# EAGLE board pcan-001 (EAGLE 9.6.2)
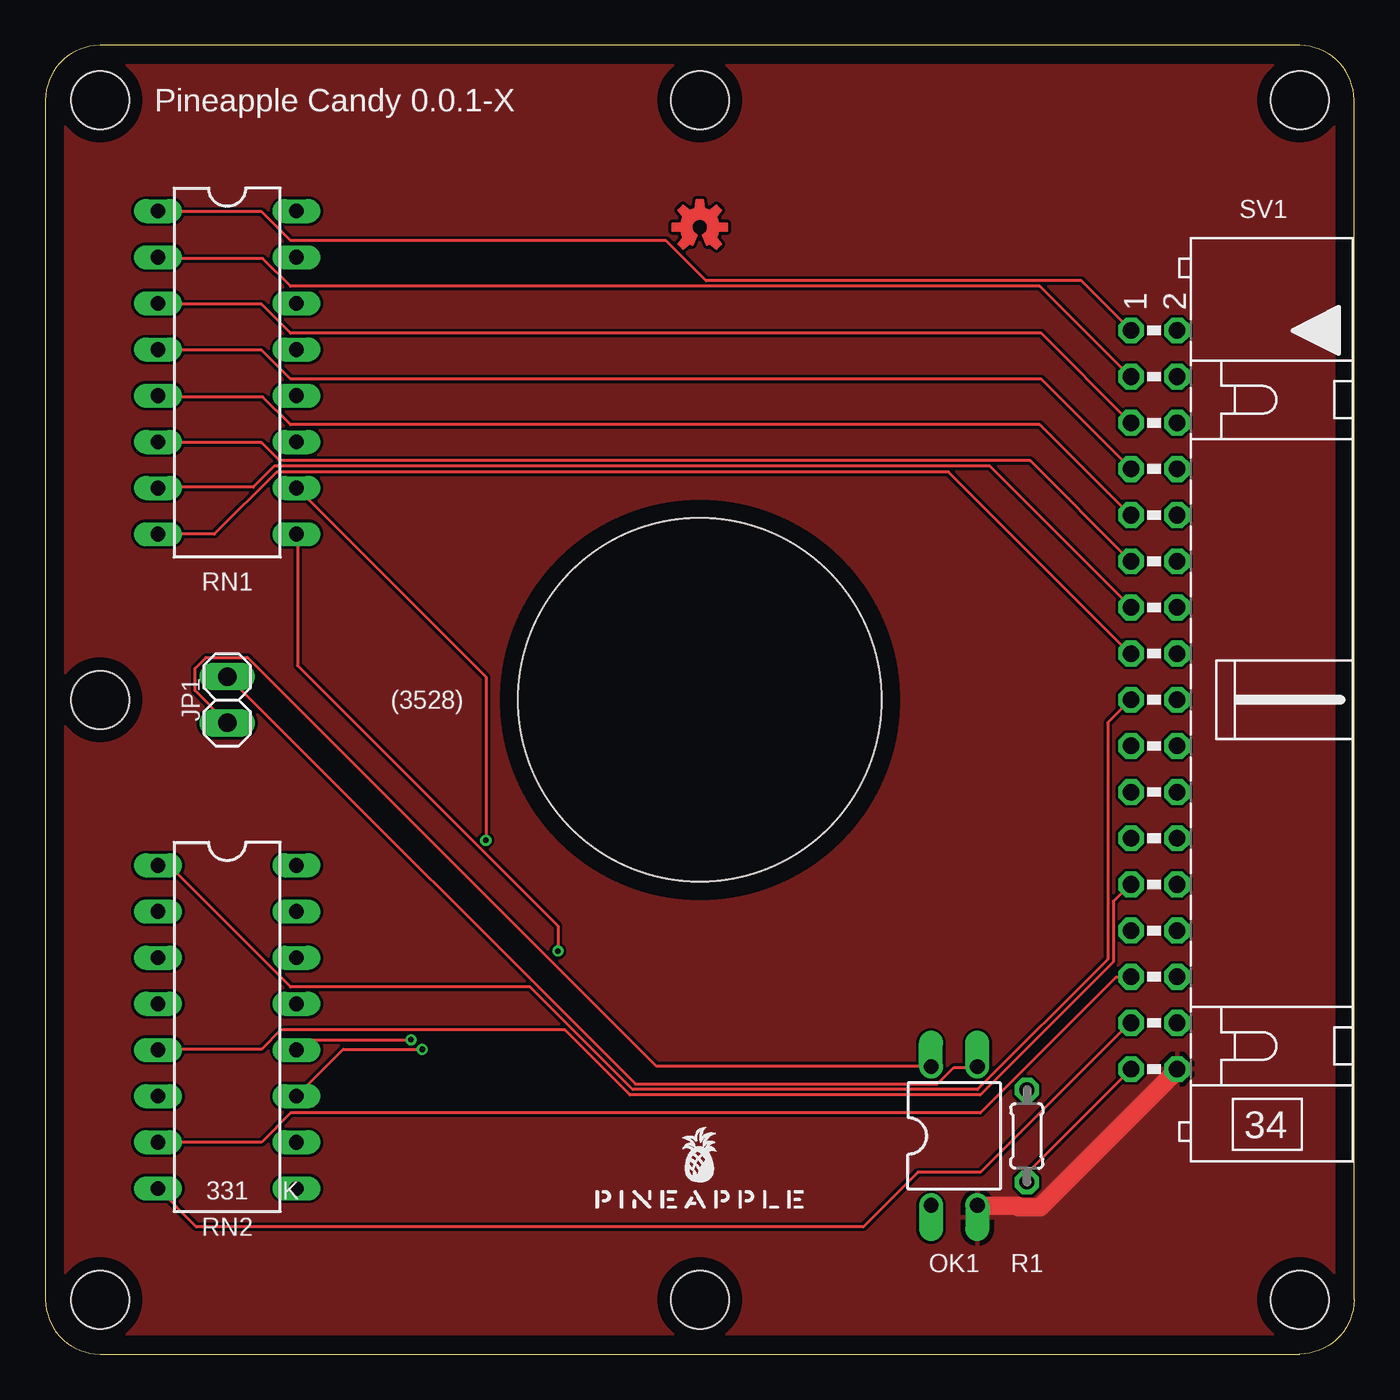
[diagram p0: board, top side]
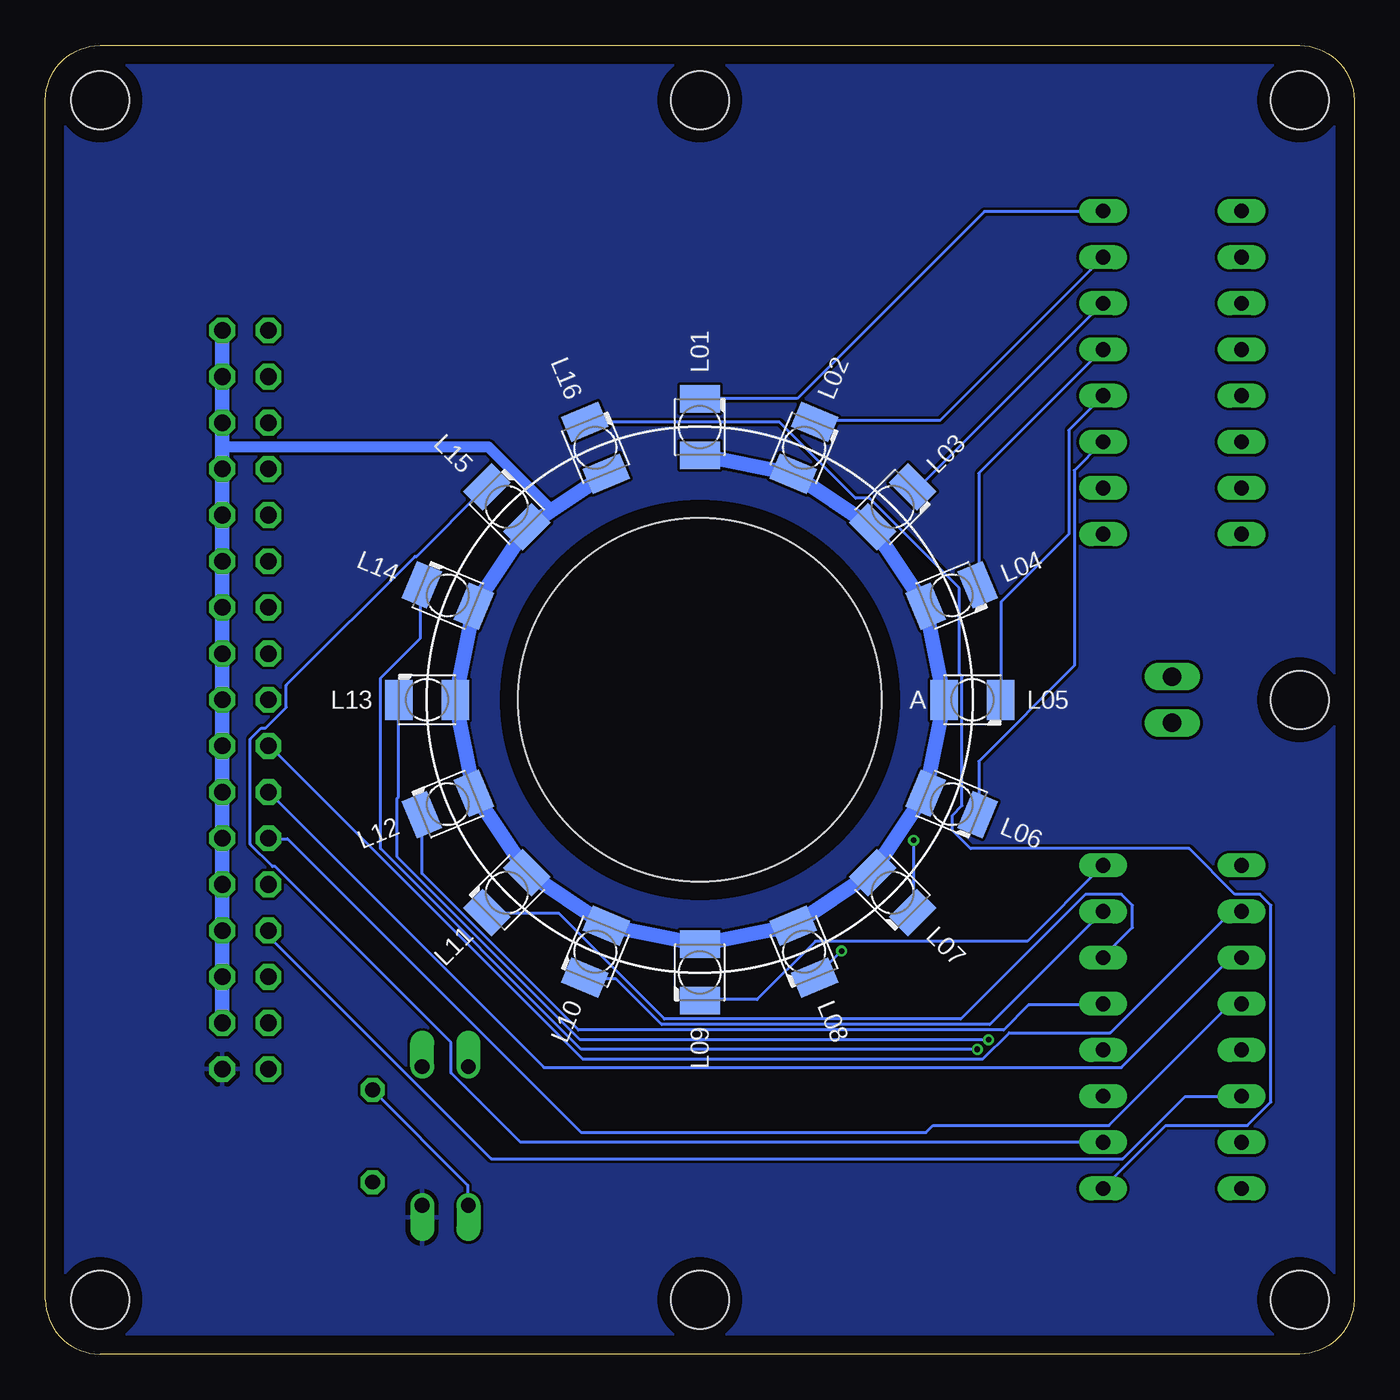
[diagram p1: board, bottom side, seen from below]

Size 72 x 72 mm. Coordinates in mm from the lower left corner, seen from the top.
Outline: 3,0 69,0 arc90 72,3 72,69 arc90 69,72 3,72 arc90 0,69 0,3 arc90 3,0
Copper layers (1*16): Top 0.035mm / dielectric 1.5mm / Bottom 0.035mm
Design rules "SeeedStudio_2layer_DRU_no_angle_20140221": minimum track width 6mil, minimum drill 12mil, track to track 6mil, track to pad 6mil, pad to pad 6mil, via to via 6mil, smd to smd 0mil, copper to edge 10mil, drill to drill 10mil, minimum pad ring 10mil, minimum via ring 6mil, stop-mask expansion 2mil, vias tented up to drill 100mil, thermal gap 10mil
Net classes: 0 default: width 0.152 mm, drill 0.152 mm, clearance 0.152 mm; 1 gnd: width 1.016 mm, drill 0.152 mm, clearance 0.152 mm; 2 power: width 0.61 mm, drill 0.152 mm, clearance 0.152 mm; 3 analog: width 0.305 mm, drill 0.152 mm, clearance 0.152 mm; 4 superpower: width 1.016 mm, drill 0.152 mm, clearance 0.152 mm
Holes 3.2 mm at 3,3 3,69 36,69 36,3 69,69 69,3 3,36
Holes 20 mm at 36,36
tRestrict: area 0.8,66.8 to 5.2,71.2; area 0.8,0.8 to 5.2,5.2; area 66.8,66.8 to 71.2,71.2; area 66.8,0.8 to 71.2,5.2; area 0,71 to 72,72; area 0,0 to 72,1; area 0,0 to 1,72; area 71,0 to 72,72; area 25.5,25.5 to 46.5,46.5; area 33.8,66.8 to 38.2,71.2; area 33.8,0.8 to 38.2,5.2; area 0.8,33.8 to 5.2,38.2
bRestrict: area 0.8,0.8 to 5.2,5.2; area 0.8,66.8 to 5.2,71.2; area 33.8,0.8 to 38.2,5.2; area 0,71 to 72,72; area 0,0 to 72,1; area 0,0 to 1,72; area 71,0 to 72,72; area 25.5,25.5 to 46.5,46.5; area 66.8,0.8 to 71.2,5.2; area 33.8,66.8 to 38.2,71.2; area 66.8,66.8 to 71.2,71.2; area 0.8,33.8 to 5.2,38.2
vRestrict: area 29,7 to 43,13

## Footprints (pad centres in the part's own frame; a part is rotated, then mirrored left to right if it is on the bottom)
1X02 = drill 1.016 long: 1 -1.27,0; 2 1.27,0
KA-3528ASYC = smd 1.5 x 2.2: A -1.55,0; C 1.55,0
DIL04 = drill 0.813 offset: 1 -1.27,-3.81; 2 1.27,-3.81; 3 1.27,3.81; 4 -1.27,3.81
0204/5 = drill 0.813 octagon: 1 -2.54,0; 2 2.54,0
DIL16 = drill 0.813 long: 1 -8.89,-3.81; 2 -6.35,-3.81; 3 -3.81,-3.81; 4 -1.27,-3.81; 5 1.27,-3.81; 6 3.81,-3.81; 7 6.35,-3.81; 8 8.89,-3.81; 9 8.89,3.81; 10 6.35,3.81; 11 3.81,3.81; 12 1.27,3.81; 13 -1.27,3.81; 14 -3.81,3.81; 15 -6.35,3.81; 16 -8.89,3.81
ML34L = drill 0.914 octagon: 1 -20.32,-1.27; 2 -20.32,1.27; 3 -17.78,-1.27; 4 -17.78,1.27; 5 -15.24,-1.27; 6 -15.24,1.27; 7 -12.7,-1.27; 8 -12.7,1.27; 9 -10.16,-1.27; 10 -10.16,1.27; 11 -7.62,-1.27; 12 -7.62,1.27; 13 -5.08,-1.27; 14 -5.08,1.27; 15 -2.54,-1.27; 16 -2.54,1.27; 17 0,-1.27; 18 0,1.27; 19 2.54,-1.27; 20 2.54,1.27; 21 5.08,-1.27; 22 5.08,1.27; 23 7.62,-1.27; 24 7.62,1.27; 25 10.16,-1.27; 26 10.16,1.27; 27 12.7,-1.27; 28 12.7,1.27; 29 15.24,-1.27; 30 15.24,1.27; 31 17.78,-1.27; 32 17.78,1.27; 33 20.32,-1.27; 34 20.32,1.27

## Placement (x,y rotation side)
JP1  Optorelay  [1X02]  10,36 90 top
L01  LP-T35XW-80-BJ  [KA-3528ASYC]  36,51 90 bottom
L02  LP-T35XW-80-BJ  [KA-3528ASYC]  30.26,49.86 67.5 bottom
L03  LP-T35XW-80-BJ  [KA-3528ASYC]  25.39,46.61 45 bottom
L04  LP-T35XW-80-BJ  [KA-3528ASYC]  22.14,41.74 22.5 bottom
L05  LP-T35XW-80-BJ  [KA-3528ASYC]  21,36 0 bottom
L06  LP-T35XW-80-BJ  [KA-3528ASYC]  22.14,30.26 337.5 bottom
L07  LP-T35XW-80-BJ  [KA-3528ASYC]  25.39,25.39 315 bottom
L08  LP-T35XW-80-BJ  [KA-3528ASYC]  30.26,22.14 292.5 bottom
L09  LP-T35XW-80-BJ  [KA-3528ASYC]  36,21 270 bottom
L10  LP-T35XW-80-BJ  [KA-3528ASYC]  41.74,22.14 247.5 bottom
L11  LP-T35XW-80-BJ  [KA-3528ASYC]  46.61,25.39 225 bottom
L12  LP-T35XW-80-BJ  [KA-3528ASYC]  49.86,30.26 202.5 bottom
L13  LP-T35XW-80-BJ  [KA-3528ASYC]  51,36 180 bottom
L14  LP-T35XW-80-BJ  [KA-3528ASYC]  49.86,41.74 157.5 bottom
L15  LP-T35XW-80-BJ  [KA-3528ASYC]  46.61,46.61 135 bottom
L16  LP-T35XW-80-BJ  [KA-3528ASYC]  41.74,49.86 112.5 bottom
LOGO1  OSHW-LOGOS-COPPER  [OSHW-LOGO-S_COPPER]  36,62 0 top
OK1  LTV816  [DIL04]  50,12 0 top
R1  220  [0204/5]  54,12 90 top
RN1  330  [DIL16]  10,54 270 top
RN2  330  [DIL16]  10,18 270 top
SV1  [ML34L]  61,36 270 top
U$1  PINEAPPLE450_SILK  [PINEAPPLE450_SILK]  36,8 0 top

## Library data of the parts
JP1 = pinhead
L01-L09 L10-L16 = led
LOGO1 = SparkFun-Aesthetics
OK1 = optocoupler; OC_FARNELL: unknown; OC_NEWARK: unknown
R1 = rcl; SPICEPREFIX: R
RN1 RN2 = resistor-dil; OC_FARNELL: unknown; OC_NEWARK: unknown
SV1 = con-ml; OC_FARNELL: unknown; OC_NEWARK: unknown
U$1 = pineapple

## Nets
GND [gnd]: OK1.2 SV1.34
LD00: RN1.1 SV1.1
LD01: RN1.2 SV1.3
LD02: RN1.3 SV1.5
LD03: RN1.4 SV1.7
LD04: RN1.5 SV1.9
LD05: RN1.6 SV1.11
LD06: RN1.7 SV1.13
LD07: RN1.8 SV1.15
LD08: RN2.1 SV1.17
LD09: RN2.2 SV1.19
LD10: RN2.3 SV1.21
LD11: RN2.4 SV1.23
LD12: RN2.5 SV1.25
LD13: RN2.6 SV1.27
LD14: RN2.7 SV1.29
LD15: RN2.8 SV1.31
MNTR: R1.1 SV1.33
N$1: L01.C RN1.16
N$2: L02.C RN1.15
N$3: L03.C RN1.14
N$4: L04.C RN1.13
N$5: L05.C RN1.12
N$6: L06.C RN1.11
N$7: L07.C RN1.10
N$8: L08.C RN1.9
N$9: L09.C RN2.16
N$10: L10.C RN2.15
N$11: L11.C RN2.14
N$12: L12.C RN2.13
N$13: L13.C RN2.12
N$14: L14.C RN2.11
N$15: L15.C RN2.10
N$16: L16.C RN2.9
N$17: OK1.1 R1.2
N$19: JP1.2 OK1.3
N$20: JP1.1 OK1.4
VIN [power]: L01.A L02.A L03.A L04.A L05.A L06.A L07.A L08.A L09.A L10.A L11.A L12.A L13.A L14.A L15.A L16.A SV1.2 SV1.4 SV1.6 SV1.8 SV1.10 SV1.12 SV1.14 SV1.16 SV1.18 SV1.20 SV1.22 SV1.24 SV1.26 SV1.28 SV1.30 SV1.32

## Tracks (layer width: path | path; a pad name or v marks a point on that pad's centre or on a via)
GND
  Top 1.016: OK1.2 51.28,8.15 53.49,8.15 53.57,8.08 54.71,8.08 62.26,15.62 SV1.34
  pour Top: -1,-1 73,-1 73,73 -1,73
  pour Bottom: -2,-2 74,-2 74,74 -2,74
LD00
  Top 0.152: RN1.1 6.25,62.87 11.89,62.87 13.49,61.27 34.14,61.27 36.35,59.05 57,59.05 59.66,56.39 SV1.1
LD01
  Top 0.152: RN1.2 6.25,60.27 11.96,60.27 13.49,58.75 54.71,58.75 59.66,53.8 SV1.3
LD02
  Top 0.152: RN1.3 6.25,57.76 11.89,57.76 13.49,56.16 54.79,56.16 59.66,51.28 SV1.5
LD03
  Top 0.152: RN1.4 6.25,55.24 11.89,55.24 13.49,53.65 54.79,53.65 59.66,48.77 SV1.7
LD04
  Top 0.152: RN1.5 6.25,52.65 11.96,52.65 13.49,51.13 54.71,51.13 59.66,46.18 SV1.9
LD05
  Top 0.152: RN1.6 6.25,50.14 11.89,50.14 12.88,49.15 54.18,49.15 59.66,43.66 SV1.11
LD06
  Top 0.152: RN1.7 6.25,47.7 11.43,47.7 12.57,48.84 51.97,48.84 59.66,41.15 SV1.13
LD07
  Top 0.152: RN1.8 6.25,45.11 9.3,45.11 12.72,48.54 49.68,48.54 59.66,38.56 SV1.15
LD08
  Top 0.152: RN2.1 6.25,26.82 6.86,26.82 13.49,20.19 26.67,20.19 32.31,14.55 51.28,14.55 58.45,21.72 58.45,34.75 59.66,35.97 SV1.17
LD09
  Bottom 0.152: RN2.2 6.25,24.31 6.78,24.31 13.41,17.68 18.97,17.68 20.42,16.23 42.44,16.23 59.66,33.45 SV1.19
LD10
  Bottom 0.152: RN2.3 6.25,21.79 6.78,21.79 12.8,15.77 44.58,15.77 59.66,30.86 SV1.21
LD11
  Bottom 0.152: RN2.4 6.25,19.2 6.86,19.2 13.49,12.57 23.16,12.57 23.55,12.19 42.52,12.19 58.67,28.35 59.66,28.35 SV1.23
LD12
  Top 0.152: RN2.5 6.25,16.76 11.89,16.76 12.95,17.83 28.57,17.83 32.16,14.25 51.44,14.25 58.75,21.57 58.75,24.92 59.66,25.83 SV1.25
LD13
  Bottom 0.152: RN2.6 6.25,14.17 9.3,14.17 12.72,10.74 47.47,10.74 59.66,22.94 59.66,23.24 SV1.27
LD14
  Top 0.152: RN2.7 6.25,11.66 11.89,11.66 13.49,13.26 51.44,13.26 58.9,20.73 59.66,20.73 SV1.29
LD15
  Top 0.152: SV1.31 59.66,18.21 51.45,10 48,10 45,7 8.3,7 RN2.8
MNTR
  Top 0.152: R1.1 54.03,9.53 54.03,9.98 59.66,15.62 SV1.33
N$1
  Bottom 0.152: L01.C 35.97,52.58 30.63,52.58 20.34,62.87 13.87,62.87 RN1.16
N$2
  Bottom 0.152: L02.C 29.64,51.36 22.78,51.36 13.87,60.27 RN1.15
N$3
  Bottom 0.152: L03.C 24.23,47.78 23.85,47.78 13.87,57.76 RN1.14
N$4
  Bottom 0.152: L04.C 20.65,42.37 20.65,48.46 13.87,55.24 RN1.13
N$5
  Bottom 0.152: L05.C 19.43,36.04 19.43,41.38 15.7,45.11 15.7,50.83 13.87,52.65 RN1.12
N$6
  Bottom 0.152: L06.C 20.65,29.72 20.65,32.61 15.39,37.87 15.39,48.62 13.87,50.14 RN1.11
N$7  (via drill 0.3)
  Top 0.152: v24.23,28.27 24.23,37.26 13.87,47.62 RN1.10
  Bottom 0.152: v24.23,28.27 24.23,24.31 L07.C
N$8  (via drill 0.3)
  Top 0.152: v28.19,22.17 28.19,23.55 13.87,37.87 13.87,45.03 RN1.9
  Bottom 0.152: v28.19,22.17 29.64,20.73 L08.C
N$9
  Bottom 0.152: L09.C 35.97,19.51 32.84,19.51 29.64,22.71 17.98,22.71 13.87,26.82 RN2.16
N$10
  Bottom 0.152: L10.C 42.29,20.65 40.62,20.65 38.1,18.14 20.04,18.14 13.87,24.31 RN2.15
N$11
  Bottom 0.152: L11.C 47.7,24.23 43.74,24.23 37.95,18.44 21.64,18.44 14.78,25.3 12.8,25.3 12.19,24.69 12.19,23.47 13.79,21.87 RN2.14
N$12
  Bottom 0.152: L12.C 51.28,29.64 51.28,26.44 42.67,17.83 19.28,17.83 17.91,19.2 13.87,19.2 RN2.13
N$13  (via drill 0.3)
  Top 0.152: v20.12,17.3 14.4,17.3 13.87,16.76 RN2.12
  Bottom 0.152: v20.12,17.3 42.6,17.3 52.65,27.36 52.65,30.56 52.58,30.63 52.58,35.97 L13.C
N$14  (via drill 0.3)
  Top 0.152: v20.73,16.76 16.38,16.76 13.87,14.25 RN2.11
  Bottom 0.152: v20.73,16.76 42.52,16.76 53.57,27.81 53.57,37.19 51.36,39.4 51.36,42.29 L14.C
N$15
  Bottom 0.152: L15.C 47.78,47.7 51.59,43.89 51.66,43.89 58.75,36.8 58.75,35.59 59.89,34.44 60.12,34.44 60.73,33.83 60.73,28.04 59.51,26.82 59.36,26.82 49.68,17.14 49.68,15.47 45.87,11.66 13.87,11.66 RN2.10
N$16
  Bottom 0.152: L16.C 42.29,51.28 31.62,51.28 27.43,47.09 26.67,47.09 21.72,42.14 21.72,37.41 21.57,37.26 21.57,30.18 22.1,29.64 22.1,28.8 21.11,27.81 9.07,27.81 6.55,25.3 5.18,25.3 4.57,24.69 4.57,13.87 5.87,12.57 10.36,12.57 13.79,9.14 RN2.9
N$17
  Bottom 0.152: OK1.1 48.77,8.23 48.77,9.3 53.95,14.48 R1.2
N$19
  Top 0.152: OK1.3 51.21,15.77 49.99,15.77 49.07,14.86 32.46,14.86 10.06,37.26 JP1.2
N$20
  Top 0.152: OK1.4 48.69,15.85 33.6,15.85 11.12,38.33 8.84,38.33 8.23,37.72 8.23,36.5 9.98,34.75 JP1.1
VIN
  Bottom 0.61: 62.27,49.91 47.62,49.91 44.42,46.71 44.21,46.39
  Bottom 0.8: L01.A L02.A L03.A L04.A L05.A L06.A L07.A L08.A L09.A L10.A L11.A L12.A L13.A L14.A L15.A 44.21,46.39 L16.A | SV1.32 SV1.30 SV1.28 SV1.26 SV1.24 SV1.22 SV1.20 SV1.18 SV1.16 SV1.14 SV1.12 SV1.10 SV1.8 62.27,49.91 SV1.6 SV1.4 SV1.2

## Text on the board
tNames: Pineapple Candy 0.0.1-X | (3528) | 331 | K
bNames: A